# Altium PCB Wikiot.PcbDoc (part 1 of 2)
Units mil, origin at the board's own origin, x right, y up, seen from the top; angles counter-clockwise.
Board outline 3930 x 3935 mil, 2 copper layers (Top Layer, Bottom Layer); 175 components, 192 nets, 839 pads, 312 vias.
Unrouted connection lines stored in the file: 184.
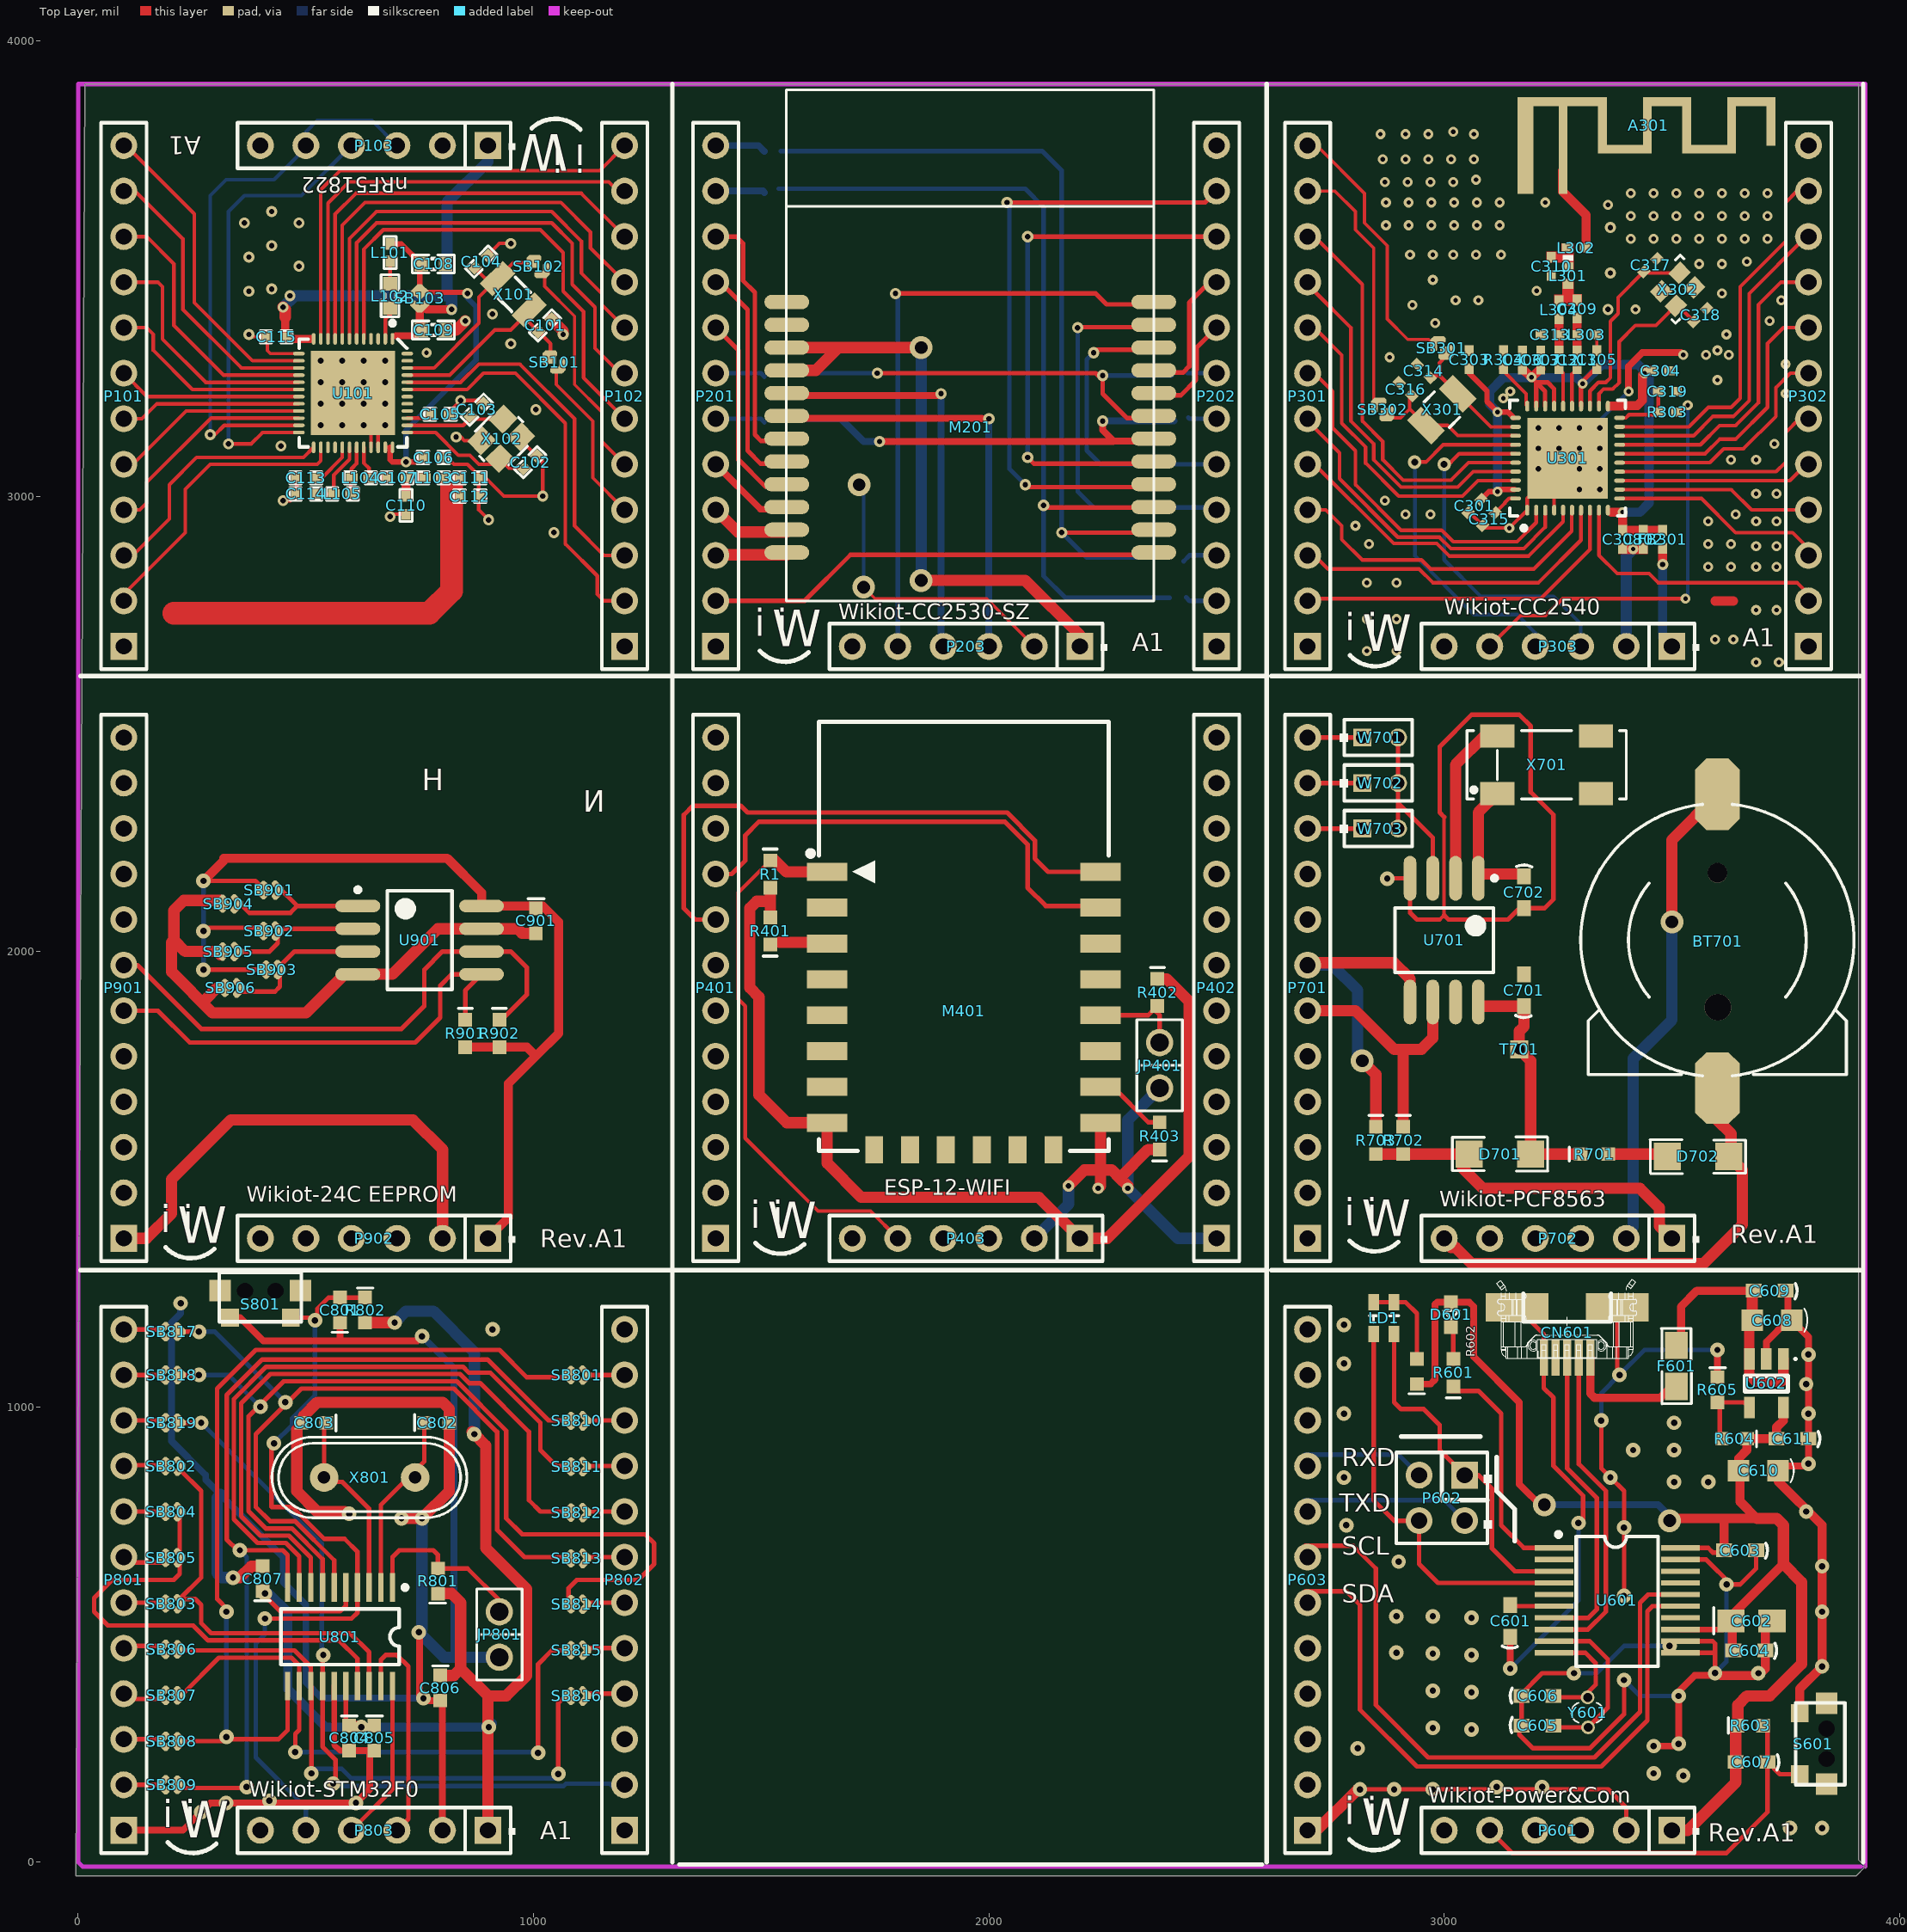
[diagram p0: Top Layer view]
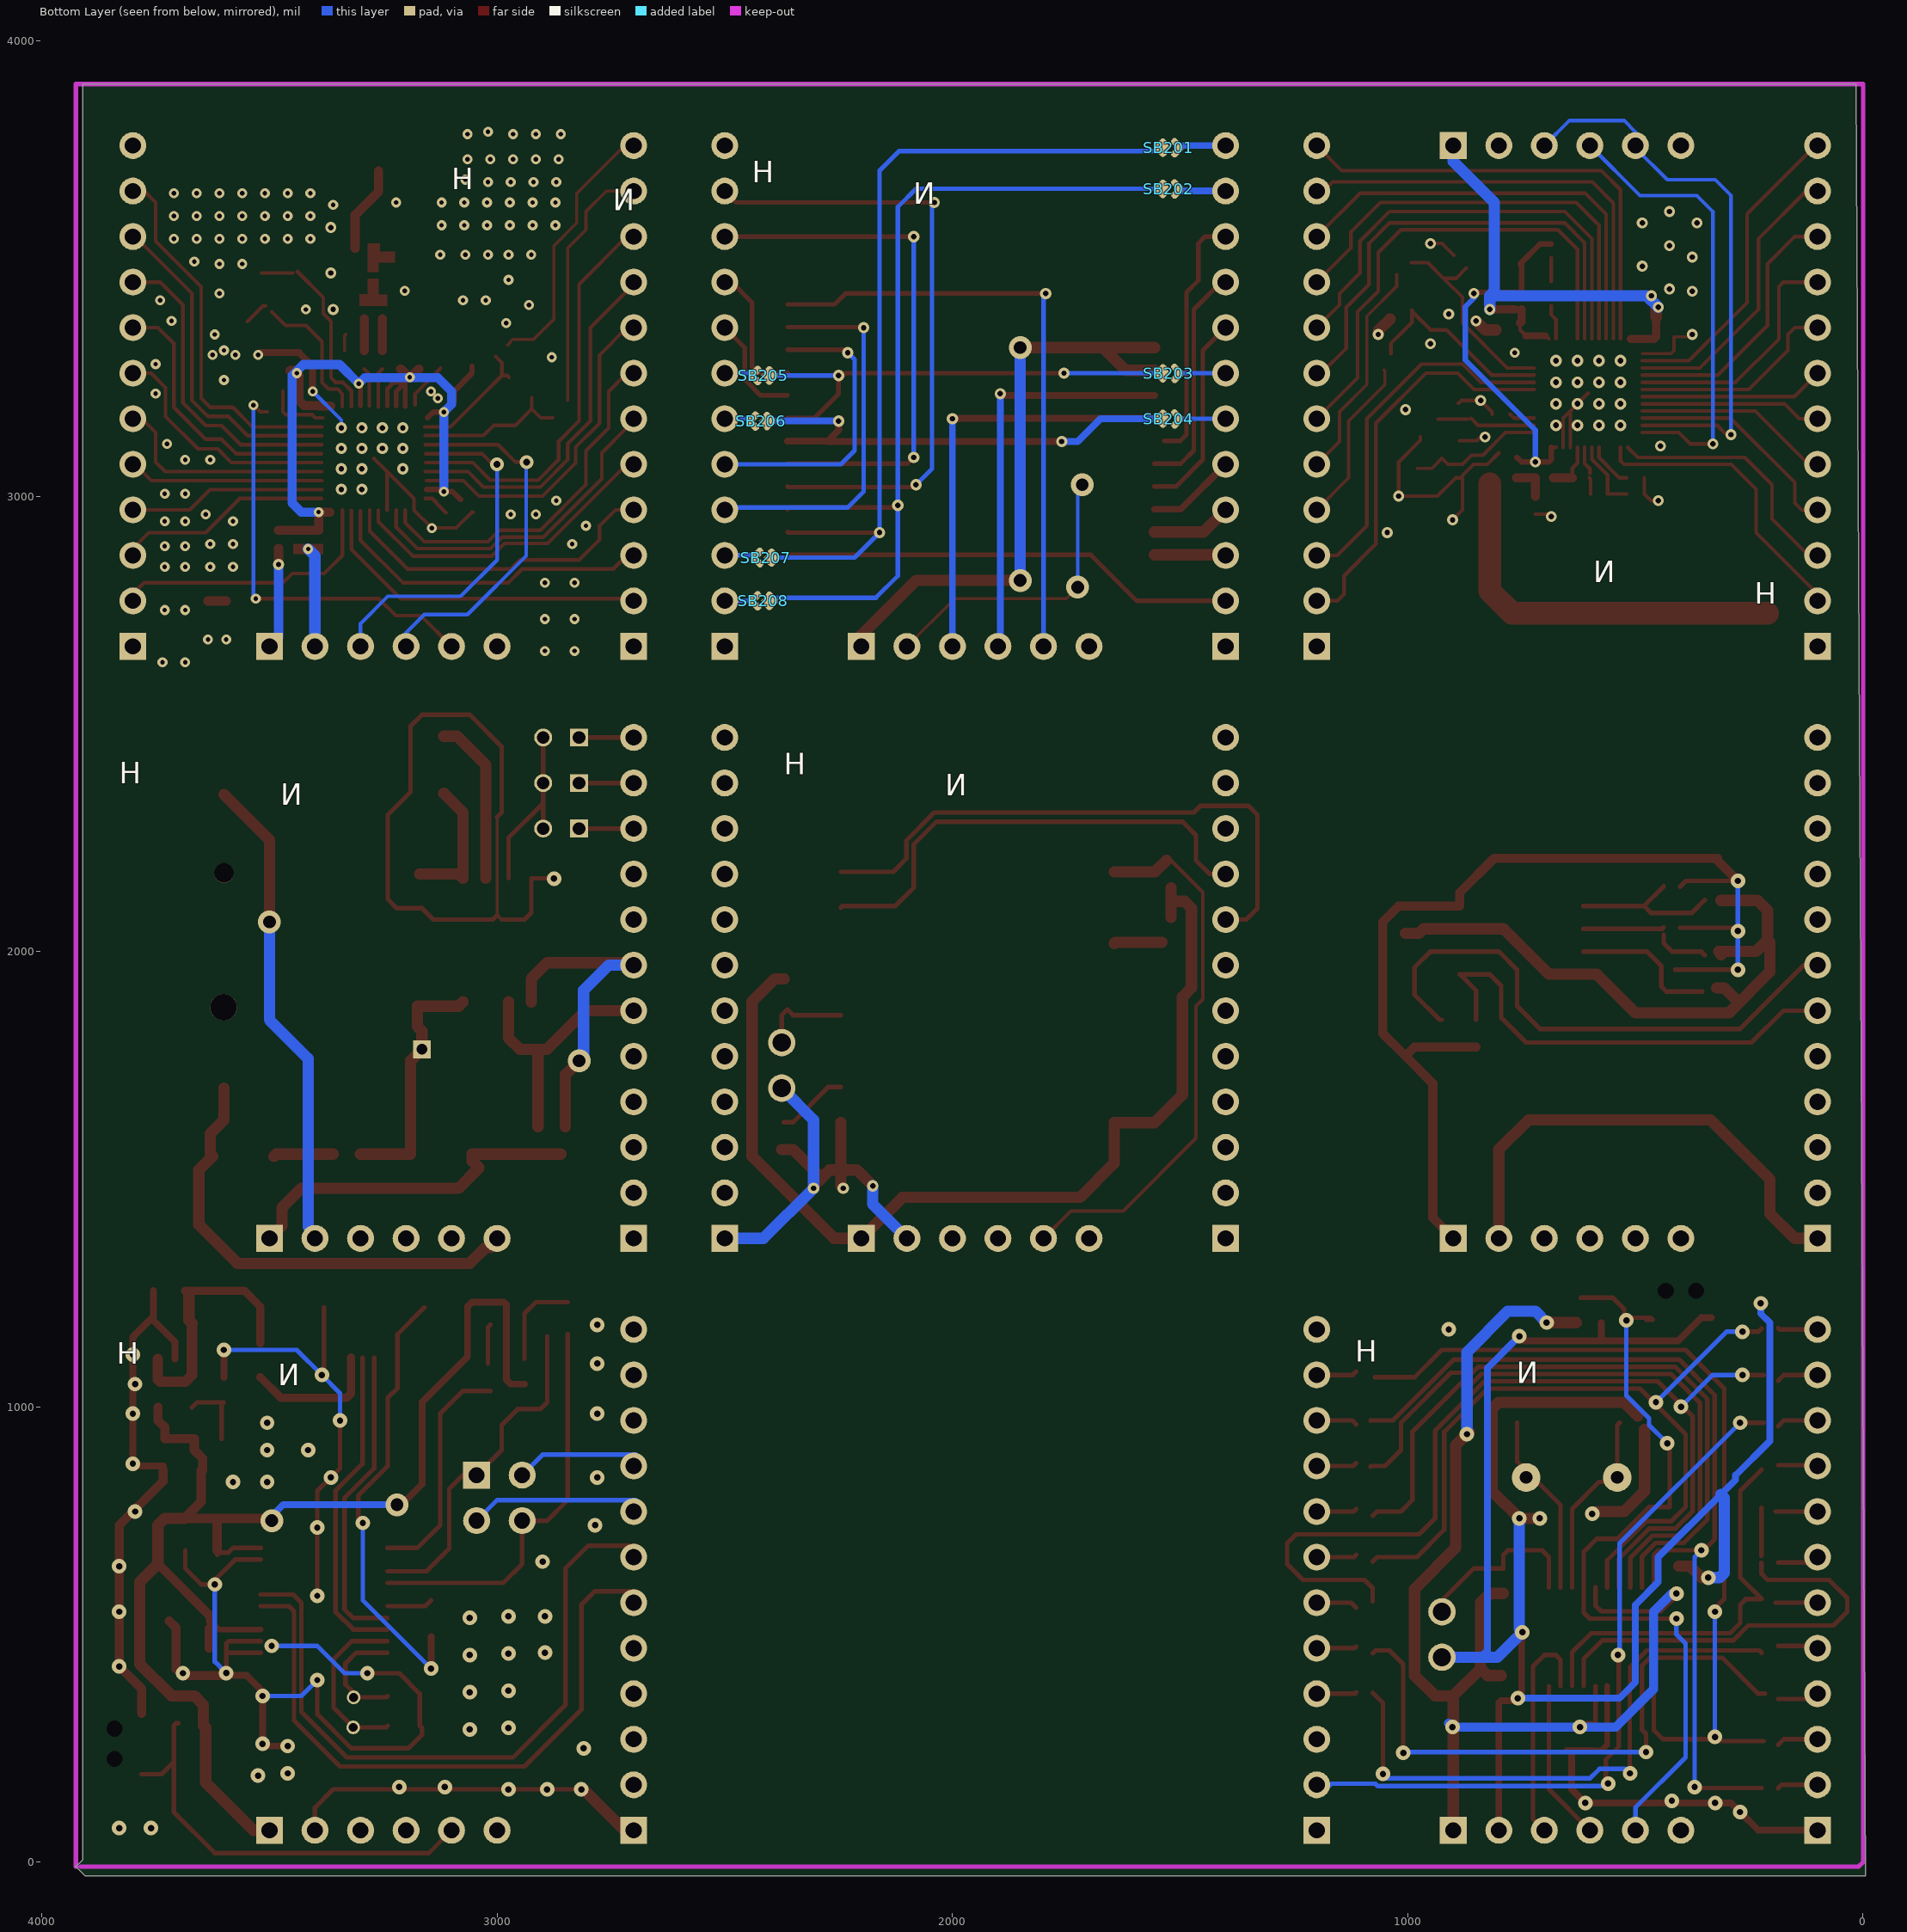
[diagram p1: Bottom Layer view, seen from below]

## Layer stack, top to bottom
Top Layer: signal copper 1.4
Dielectric: dielectric 12.6, FR-4, Dk 4.8
Bottom Layer: signal copper 1.4

## Board outline
15,3905 3910,3905 3910,5 3925,-10 3905,-30 -5,-30

## Design rules (kind name [scope] priority, off if disabled: settings)
Clearance [All] p1: gap=6
PolygonConnect [All] p1: connectstyle=Relief reliefconductorwidth=10 reliefentries=4 polygonreliefangle="90 Angle"
RoomDefinition ESP8266 [InComponentClass('ESP8266')] p1: confinementstyle=ConfineIn formatcopy=TRUE lockcomponents=FALSE outline 1269.84,1313.7 2605,1313.7 2605,2633.7 1269.84,2633.7
RoomDefinition CC2530-Module [InComponentClass('CC2530-Module')] p2: confinementstyle=ConfineIn formatcopy=TRUE lockcomponents=FALSE outline 1305,2615 2610,2615 2610,3930 1305,3930
RoomDefinition 24CXX [InComponentClass('24CXX')] p3: confinementstyle=ConfineIn formatcopy=TRUE lockcomponents=FALSE outline 0,1310 1305,1310 1305,2620 0,2620
RoomDefinition STM32F030F [InComponentClass('STM32F030F')] p4: confinementstyle=ConfineIn formatcopy=TRUE lockcomponents=FALSE outline 0,-50 1360,-50 1360,1300 0,1300
RoomDefinition PCF8563 [InComponentClass('PCF8563')] p5: confinementstyle=ConfineIn formatcopy=TRUE lockcomponents=FALSE outline 2615,1290 3940,1290 3940,2610 2615,2610
RoomDefinition Power&Com [InComponentClass('Power&Com')] p6: confinementstyle=ConfineIn formatcopy=TRUE lockcomponents=FALSE outline 2630,1295 3910,1295 3910,-10 2630,-10
RoomDefinition nRF51822 [InComponentClass('nRF51822')] p7: confinementstyle=ConfineIn formatcopy=TRUE lockcomponents=FALSE outline 0,2610 1305,2610 1305,3905 0,3905
RoomDefinition CC2541A [InComponentClass('CC2541A')] p8: confinementstyle=ConfineIn formatcopy=TRUE lockcomponents=FALSE outline 2605,2605 3925,2605 3925,3900 2605,3900
RoutingVias [All] p1: holewidth=12 width=25 viastyle="Through Hole" minholewidth=12 minwidth=25 maxholewidth=28 maxwidth=50
SilkscreenOverComponentPads SilkToSolderMaskClearance [IsPad] p1: minsilkscreentomaskgap=10
SolderMaskExpansion [All] p1: expansion=4
Width [All] p1: maxlimit=55 minlimit=7 preferedwidth=10
27 further rules are at their usual default settings.

## Classes and differential pairs
component class ESP8266: JP401 M401 P401 P402 P403 R1 R401 R402 R403
component class CC2530-Module: M201 P201 P202 P203 SB201 SB202 SB203 SB204 SB205 SB206 SB207 SB208
component class 24CXX: C901 P901 P902 R901 R902 SB901 SB902 SB903 SB904 SB905 SB906 U901
component class PCF8563: BT701 C701 C702 D701 D702 P701 P702 R701 R702 R703 T701 U701 W701 W702 W703 X701
component class Power&Com: BT? C601 C602 C603 C604 C605 C606 C607 C608 C609 C610 C611 CN601 CN? D601 F601 LD1 LS? P601 P602 P603 R601 R602 R603 R604 R605 S601 U601 U602 U? Y601
component class nRF51822: C101 C102 C103 C104 C105 C106 C107 C108 C109 C110 C111 C112 C113 C114 C115 L101 L102 L103 L104 L105 P101 P102 P103 SB101 SB102 SB103 U101 X101 X102
component class CC2541A: A301 C301 C302 C303 C304 C305 C306 C307 C308 C309 C310 C311 C312 C313 C314 C315 C316 C317 C318 C319 FB301 L301 L302 L303 L304 P301 P302 P303 R303 R304 SB301 SB302 U301 X301 X302
component class STM32F030F: C801 C802 C803 C804 C805 C806 C807 JP801 P801 P802 P803 R801 R802 S801 SB801 SB802 SB803 SB804 SB805 SB806 SB807 SB808 SB809 SB810 SB811 SB812 SB813 SB814 SB815 SB816 SB817 SB818 SB819 U801 X801

## Components (designator, comment, footprint, x,y, rotation, side; value= is the part's Value field where it differs from the comment)
A301 "ANTENNA IIFA BLE" Antenna_IIFA_BLE-2 3407,3800 r180 top net-tie
BT701 "Battery" "BAT CR1220" 3600,2025 r270 top
C101 "12pF" CAPC1005X04L 1025,3375 r45 top
C102 "12pF" CAPC1005X04L 992.78,3074.64 r45 top
C103 "12pF" CAPC1005X04L 875,3190 r45 top
C104 "12pF" CAPC1005X04L 885,3515 r45 top
C105 "100nF" CAPC1005X04L 795,3180 r0 top
C106 "1.0nF" CAPC1005X04L 780,3085 r0 top
C107 "2.2pF" CAPC1005X04L 700,3040 r0 top
C108 "1.0µF" CAPC1608X06L 780,3510 r180 top
C109 "4.7µF" CAPC1608X06L 780,3365 r0 top
C110 "0.8pF" CAPC1005X04L 720,2980 r270 top
C111 "1.5pF" CAPC1005X04L 860,3040 r0 top
C112 "1.2pF" CAPC1005X04L 860,3000 r0 top
C113 "47nF" CAPC1005X04L 500,3040 r180 top
C114 "2.2nF" CAPC1005X04L 500,3005 r180 top
C115 "100nF" CAPC1005X04L 435,3350 r180 top
C301 "C1005X5R0J105M" 0402L 3066.46,2978.54 r225 top
C302 "GRM155R71A104KA01D" 0402L 3437,2905 r270 top
C303 "GRM155R71A104KA01D" 0402L 3055,3300 r90 top
C304 "GRM155R71A104KA01D" 0402L 3475,3275 r0 top
C305 "GRM155R71A104KA01D" 0402L 3335,3300 r90 top
C306 "GRM1555C1H221JA01D" 0402L 3172,3299.1 r90 top
C307 "GRM155R71A104KA01D" 0402L 3212,3299.1 r90 top
C308 "JMK105BJ225MV-F" 0402L 3392,2905 r270 top
C309 "GRM1555C1H1R0CA01D" 0402L 3292,3411 r90 top
C310 "GRM1555C1HR40BA01D" 0402L 3235,3505 r270 top
C311 "GRM1555C1H180JA01D" 0402L 3291.99,3299.37 r270 top
C312 "GRM1555C1H180JA01D" 0402L 3251.99,3299.37 r270 top
C313 "GRM1555C1H1R0CA01D" 0402L 3231.99,3354.37 r180 top
C314 "GRM1555C1H150JA01D" 0402L 2955,3275 r135 top
C315 "C1005X5R0J105M" 0402L 3098.28,2949.54 r225 top
C316 "GRM1555C1H150JA01D" 0402L 2915,3235 r135 top
C317 "GRM1555C1H120JA01D" 0402L 3452.82,3507.18 r45 top
C318 "GRM1555C1H120JA01D" 0402L 3562.43,3397.57 r45 top
C319 "GRM1555C1H102JA01D" 0402L 3490,3230 r0 top
C601 "0.1uF" C0603L 3145,530 r90 top
C602 "1uF" 0805M 3630,530 r0 top
C603 "Cap" C0603L 3650,685 r180 top
C604 "Cap" C0603L 3670,465 r180 top
C605 "Cap" C0603L 3205,300 r0 top
C606 "Cap" C0603L 3205,365 r0 top
C607 "10uF" C0603L 3675,220 r180 top
C608 "22uF" C0805 3720,1190 r180 top
C609 "104" C0603L 3715,1255 r180 top
C610 "22uF" C0805 3690,860 r180 top
C611 "104" C0603L 3765,930 r180 top
C701 "100nF" C0603L 3175,1915 r90 top
C702 "22pF" C0603L 3175,2130 r270 top
C801 "100nF" 0603M 575,1185 r90 top
C802 "20pF" 0603M 760,965 r0 top
C803 "20pF" 0603M 545,965 r180 top
C804 "1uF" 0603M 595,300 r270 top
C805 "100nF" 0603M 650,300 r270 top
C806 "100nF" 0603M 795,410 r270 top
C807 "100nF" 0603M 405,595 r90 top
C901 "100nF" 0603M 1005,2095 r270 top
CN601 "USB-Micro" USB-MICRO-Lite 3270,1215 r0 top
D601 "LED1" 0603pn 3015,1230 r270 top
D701 "1N4148" 1206 3055,1555 r0 top
D702 "1N4148" 1206 3625,1550 r180 top
F601 "500mA" 0805 3510,1135 r270 top
FB301 "BLM15HG102SN1D" 0402 3480,2905 r270 top
JP401 "UART Download" SIP2 2375,1700 r90 top
JP801 "Jumper2" SIP2 925,450 r90 top
L101 "15nH" INDC1005X04L 685,3535 r90 top
L102 "10µH" INDC1608X06L 685,3440 r90 top
L103 "3.3nH" INDC1005X04L 780,3040 r0 top
L104 "4.7nH" INDC1005X04L 620,3040 r0 top
L105 "10nH" INDC1005X04L 580,3005 r0 top
L301 "LQG15HS2N2S02D" IND_LQG15H 3271.99,3484.37 r270 top
L302 "LQG15HH5N1S02D" 0402L 3290,3545 r180 top
L303 "LQG15HS2N0S02D" 0402L 3313,3355 r0 top
L304 "LQG15HS2N0S02D" 0402L 3251.99,3409.37 r270 top
LD1 "LTST-C195KGJRKT" 0805-LED-Bi 2865,1155 r90 top
M201 "CC2530 SZ1" CC2530-SMT 1555,2770 r0 top
M401 "ESP_12E" ESP_12E 1630,2175 r0 top
P101 "Synio Header-L 12-Pin" HDR1X12 100,2670 r90 top
P102 "Synio Header-R 12-Pin" HDR1X12 1200,2670 r90 top
P103 "Synio Power Header 6 Pin" HDR1X6/2.54MM 900,3770 r180 top
P201 "Synio Header-L 12-Pin" HDR1X12 1400,2670 r90 top
P202 "Synio Header-R 12-Pin" HDR1X12 2500,2670 r90 top
P203 "Synio Power Header 6 Pin" HDR1X6/2.54MM 2200,2670 r180 top
P301 "Synio Header-L 12-Pin" HDR1X12 2700,2670 r90 top
P302 "Synio Header-R 12-Pin" HDR1X12 3800,2670 r90 top
P303 "Synio Power Header 6 Pin" HDR1X6/2.54MM 3500,2670 r180 top
P401 "Synio Header-L 12-Pin" HDR1X12 1400,1370 r90 top
P402 "Synio Header-R 12-Pin" HDR1X12 2500,1370 r90 top
P403 "Synio Power Header 6 Pin" HDR1X6/2.54MM 2200,1370 r180 top
P601 "Synio Power Header 6 Pin" HDR1X6/2.54MM 3500,70 r180 top
P602 "Header 2X2" HDR2X2/2.54MM 3045,850 r180 top
P603 "Synio Header-L 12-Pin" HDR1X12 2700,70 r90 top
P701 "Synio Header-L 12-Pin" HDR1X12 2700,1370 r90 top
P702 "Synio Power Header 6 Pin" HDR1X6/2.54MM 3500,1370 r180 top
P801 "Synio Header-L 12-Pin" HDR1X12 100,70 r90 top
P802 "Synio Header-R 12-Pin" HDR1X12 1200,70 r90 top
P803 "Synio Power Header 6 Pin" HDR1X6/2.54MM 900,70 r180 top
P901 "Synio Header-L 12-Pin" HDR1X12 100,1370 r90 top
P902 "Synio Power Header 6 Pin" HDR1X6/2.54MM 900,1370 r180 top
R1 "10K" R0603 1520,2170 r270 top
R303 "CRCW04022K74FKED" 0402L 3490,3185 r180 top
R304 "CRCW040256K2FKED" 0402L 3130,3300 r270 top
R401 "10K" R0603 1520,2045 r90 top
R402 "10K" R0603 2370,1910 r270 top
R403 "1K" R0603 2375,1595 r90 top
R601 "1K" R0603 3020,1075 r90 top
R602 "1K" 0603M 2940,1050 r90 top
R603 "10K" 0603M 3645,300 r0 top
R604 "NC" 0603M 3665,930 r180 top
R605 "NC" 0603M 3600,1065 r270 top
R701 "200" R0603 3330,1555 r0 top
R702 "3.3K" R0603 2910,1585 r270 top
R703 "3.3K" R0603 2850,1585 r270 top
R801 "10K" 0603M 790,590 r90 top
R802 "100K" 0603M 630,1240 r270 top
R901 "1K" R0603 850,1820 r270 top
R902 "1K" R0603 925,1820 r270 top
S601 "RESET" KEY-2x4-SMD 3840,260 r270 top
S801 "RESET" KEY-2x4-SMD 400,1255 r0 top
SB101 "Solderbridge" JP2_SMD 1045,3295 r135 top
SB102 "Solderbridge" JP2_SMD 1010,3505 r135 top
SB103 "Solderbridge" JP2_SMD 750,3434.6 r90 top
SB201 "Circuit Breaker" JP2_SMD 1525,3765 r0 bottom
SB202 "Circuit Breaker" JP2_SMD 1525,3675 r0 bottom
SB203 "Circuit Breaker" JP2_SMD 1525,3270 r0 bottom
SB204 "Circuit Breaker" JP2_SMD 1525,3170 r0 bottom
SB205 "Circuit Breaker" JP2_SMD 2415,3265 r180 bottom
SB206 "Circuit Breaker" JP2_SMD 2420,3165 r180 bottom
SB207 "Circuit Breaker" JP2_SMD 2410,2865 r180 bottom
SB208 "Circuit Breaker" JP2_SMD 2415,2770 r180 bottom
SB301 "Solderbridge" JP2_SMD 2995,3325 r315 top
SB302 "Solderbridge" JP2_SMD 2865,3190 r315 top
SB801 "Circuit Breaker" JP2_SMD 1095,1070 r180 top
SB802 "Circuit Breaker" JP2_SMD 204.74,870 r180 top
SB803 "Circuit Breaker" JP2_SMD 204.74,567.97 r180 top
SB804 "Circuit Breaker" JP2_SMD 204.74,769.32 r180 top
SB805 "Circuit Breaker" JP2_SMD 204.74,668.65 r180 top
SB806 "Circuit Breaker" JP2_SMD 205,467.03 r0 top
SB807 "Circuit Breaker" JP2_SMD 205,366.35 r0 top
SB808 "Circuit Breaker" JP2_SMD 205,265.68 r0 top
SB809 "Circuit Breaker" JP2_SMD 205,170 r0 top
SB810 "Circuit Breaker" JP2_SMD 1095,969.29 r180 top
SB811 "Circuit Breaker" JP2_SMD 1095,868.57 r180 top
SB812 "Circuit Breaker" JP2_SMD 1095,767.86 r180 top
SB813 "Circuit Breaker" JP2_SMD 1095,667.14 r180 top
SB814 "Circuit Breaker" JP2_SMD 1095,566.43 r180 top
SB815 "Circuit Breaker" JP2_SMD 1095,465.71 r180 top
SB816 "Circuit Breaker" JP2_SMD 1095,365 r180 top
SB817 "Circuit Breaker" JP2_SMD 205,1165 r0 top
SB818 "Circuit Breaker" JP2_SMD 205,1070 r0 top
SB819 "Circuit Breaker" JP2_SMD 205,965 r0 top
SB901 "Circuit Breaker" JP2_SMD 420,2135 r180 top
SB902 "Circuit Breaker" JP2_SMD 420,2045 r180 top
SB903 "Circuit Breaker" JP2_SMD 425,1960 r180 top
SB904 "Circuit Breaker" JP2_SMD 330,2105 r180 top
SB905 "Circuit Breaker" JP2_SMD 330,2000 r180 top
SB906 "Circuit Breaker" JP2_SMD 335,1920 r180 top
T701 "TP" TP 3165,1785 r90 top
U101 "nRF51822-QFAA" QFN40P600X600X90-48N 603.62,3226.38 r270 top
U301 "CC2541RHA" RHA0040H 3270.99,3083.37 r90 top
U601 "CH341T" SSOP20 3380,575 r270 top
U602 "LDO" SOT23-5 3745,1105 r180 top
U701 "PCF8563" SO8W_M 3000,2025 r270 top
U801 "STM32F030F4" TSSOP20 575,495 r180 top
U901 "AT24C32" SO8W_M 750,2025 r0 top
W701 "Jumper2-1" HDR1X2/2.00MM 2820,2470 r0 top
W702 "Jumper2-1" HDR1X2/2.00MM 2820,2370 r0 top
W703 "Jumper2-1" HDR1X2/2.00MM 2820,2270 r0 top
X101 "32.768kHz" FC-135 955.86,3443.28 r315 top
X102 "16MHz" BT-XTAL_2520 929.14,3126.09 r45 top
X301 "ABS07-32.768KHZ-9-T" XTAL_ABS07 2995,3190 r225 top
X302 "Q22FA1280009200" XTAL_FA-128 3512.93,3454.14 r315 top
X701 "MC306-32.768-12.5pF-20PPM" SM8 3225,2410 r0 top
X801 "8MHz" XTAL_49S 640,845 r0 top
Y601 "12MHz" XTAL0803 3315,330 r90 top

## Footprints (in the part's own frame and the unit in brackets; to place one, negate y for a bottom-side part, rotate by r counter-clockwise, add the part's x,y. Pads: shape width x height; smd on the part's side, far side on the other; paste and mask are expansions set on the pad)
0402 [mm] "Chip Capacitor, Body 1.0x0.5mm, IPC High Density"
  rect 0.6x0.5 smd: 1(-0.5,0) 2(0.5,0)
  body extent -0.55,-0.3 0.55,0.3, height 1.3
0402L [mm] "0402 from SM-752 data"
  rect 0.6x0.5 smd: 1(-0.5,0) 2(0.5,0)
  body extent -0.55,-0.3 0.55,0.3, height 0.6
0603M [mil]
  rect 30x30 smd: 1(0,0) 2(55,0)
  silkscreen extent -21,-17 -21,18, body extent -5,-15 60,15, height 43
0603pn [mil]
  rect 30x30 smd: 1(0,0) 2(55,0)
  silkscreen extent 19,-17 36,18
0805 [mil]
  rect 60x50 smd: 1(0,0) 2(90,0)
  silkscreen extent -37,-33 129,33
0805-LED-Bi [mm]
  rect 0.9x0.6 smd: 1(0.127,-0.635) 2(0.127,0.508) 3(1.905,0.508) 4(1.905,-0.635)
  silkscreen extent 0.76,-0.89 1.14,0.76, body extent 0.32,-1.02 1.72,0.9, height 1.1
0805M [mil]
  rect 60x50 smd: 1(0,0) 2(90,0)
  silkscreen extent -38,-29 -38,29
1206 [mil]
  rect 60x60 smd: 1(0,0) 2(135,0)
  silkscreen extent -37,-37 173,38, body extent 15,-30 120,30, height 43
Antenna_IIFA_BLE-2 [mm]
  rect 0.5x5.39 smd paste-0.3 mask-0.3: 1(3.706,0.77)
  rect 5x0.5 smd paste-0.3 mask-0.3: 1B(3.756,-1.675)
  rect 0.5x3.14 smd paste-0.3 mask-0.3: 1C(1.506,-0.355) 1E(-0.994,-0.355) 1G(-3.194,-0.355) 1J(-5.694,-0.355)
  rect 3x0.5 smd paste-0.3 mask-0.3: 1D(0.256,0.965)
  rect 2.7x0.5 smd paste-0.3 mask-0.3: 1F(-2.094,-1.675) 1H(-4.319,0.965) 1K(-6.794,-1.675)
  rect 0.5x2.69 smd paste-0.3 mask-0.3: 1L(-7.894,-0.58)
  rect 0.9x5.39 smd paste-0.45 mask-0.45: 2(5.806,0.77)
"BAT CR1220" [mm]
  round 1.1 hole 1.1 unplated: 0(-3.75,0)
  round 1.5 hole 1.5 unplated: 0(3.75,0.025)
  oct 4x2.5 smd: 1(8.255,0) 2(-8.128,0)
  silkscreen extent -7.57,-7.62 7.57,7.62
BT-XTAL_2520 [mm]
  rect 1.2x1.1 smd: 1(-0.85,-0.7) 2(0.85,-0.7) 3(0.85,0.7) 4(-0.85,0.7)
  silkscreen extent -1.55,-1.33 1.53,1.32, body extent -1.25,-1 1.27,1, height 0.56
C0603L [mil]
  rect 35x30 smd: 1(-35,0) 2(35,0)
  silkscreen extent -60,-16 -56,18, body extent -31,-16 32,15, height 24
C0805 [mm]
  rect 1.2x1.2 smd: 1(-1.1,0) 2(1.1,0)
  silkscreen extent -1.97,-0.65 -1.8,0.65, body extent -0.99,-0.61 1.01,0.59, height 1.2
CAPC1005X04L [mm]
  rect 0.6x0.5 smd: 1(-0.5,0) 2(0.5,0)
  silkscreen extent -0.9,-0.35 0.9,0.35, body extent -0.51,-0.25 0.51,0.25, height 0.5
CAPC1608X06L [mm] "Chip Capacitor, 2-Leads, Body 1.6x0.8mm, IPC High Dens"
  rect 0.75x0.8 smd: 1(-0.675,0) 2(0.675,0)
  silkscreen extent -1.17,-0.5 1.17,0.5, body extent -0.8,-0.43 0.8,0.43, height 0.8
CC2530-SMT [mm]
  oval 2.5x0.8 smd: 1(0.031,16.67) 2(0.031,15.4) 3(0.031,14.13) 4(0.031,12.86) 5(0.031,11.59) 6(0.031,10.32) 7(0.031,9.05) 8(0.031,7.78) 9(0.031,6.51) 10(0.031,5.24) 11(0.031,3.97) 12(0.031,2.7) 13(20.5,2.7) 14(20.5,3.97) 15(20.5,5.24) 16(20.5,6.51) 17(20.5,7.78) 18(20.5,9.05) 19(20.5,10.32) 20(20.5,11.59) 21(20.5,12.86) 22(20.5,14.13) 23(20.5,15.4) 24(20.5,16.67)
  silkscreen extent 0,0 20.5,28.5
ESP_12E [mm] "ESP-12 Wi-Fi Module by AI-Thinker"
  rect 2.25x1 smd: 1(0.375,0) 2(0.375,-2) 3(0.375,-4) 4(0.375,-6) 5(0.375,-8) 6(0.375,-10) 7(0.375,-12) 8(0.375,-14) 15(15.625,-14) 16(15.625,-12) 17(15.625,-10) 18(15.625,-8) 19(15.625,-6) 20(15.625,-4) 21(15.625,-2) 22(15.625,0)
  rect 1x1.5 smd: 9(3,-15.5) 10(5,-15.5) 11(7,-15.5) 12(9,-15.5) 13(11,-15.5) 14(13,-15.5)
  silkscreen extent -0.7,-15.57 16.08,8.37, body extent 0,-15.49 16,8.51, height 2.75
FC-135 [mm]
  rect 1x1.8 smd: 1(-1.25,0) 2(1.25,0)
  silkscreen extent -0.6,-0.75 0.6,0.75, body extent -1.6,-0.75 1.6,0.75, height 0.81
HDR1X2/2.00MM [mm] "Connector; Header; 2 Position"
  rect 1x1 hole 0.7: 1(0,0)
  round 1 hole 0.7: 2(2,0)
  silkscreen extent -1.27,-1 2.79,1
HDR1X6/2.54MM [mm] "Connector; Header; 6 Position"
  rect 1.5x1.5 hole 0.9: 1(0,0)
  round 1.5 hole 0.9: 2(2.54,0) 3(5.08,0) 4(7.62,0) 5(10.16,0) 6(12.7,0)
  silkscreen extent -1.52,-1.27 13.97,1.27
HDR1X12 [mm] "Connector; Header; 12 Position"
  rect 1.5x1.5 hole 0.9: 1(0,0)
  round 1.5 hole 0.9: 2(2.54,0) 3(5.08,0) 4(7.62,0) 5(10.16,0) 6(12.7,0) 7(15.24,0) 8(17.78,0) 9(20.32,0) 10(22.86,0) 11(25.4,0) 12(27.94,0)
  silkscreen extent -1.27,-1.27 29.21,1.27
HDR2X2/2.54MM [mm] "Connector; Header; 2x2 Position"
  rect 1.5x1.5 hole 0.9: 1(0,0)
  round 1.5 hole 0.9: 2(0,2.54) 3(2.54,0) 4(2.54,2.54)
  silkscreen extent -1.52,-1.27 3.81,3.81
IND_LQG15H [mm] "MuRata"
  rect 0.55x0.6 smd: 1(-0.475,0) 2(0.475,0)
  silkscreen extent -1.16,-0.3 -0.81,0.3, body extent -0.52,-0.27 0.52,0.27, height 0.55
INDC1005X04L [mm] "Chip Inductor, 2-Leads, Body 1.0x0.5mm, IPC High Density"
  rect 0.65x0.5 smd: 1(-0.475,0) 2(0.475,0)
  silkscreen extent -0.9,-0.35 0.9,0.35, body extent -0.5,-0.3 0.5,0.3, height 0.5
INDC1608X06L [mm]
  rect 0.75x0.8 smd: 1(-0.675,0) 2(0.675,0)
  silkscreen extent -1.17,-0.5 1.17,0.5, body extent -0.8,-0.48 0.8,0.48, height 0.8
JP2_SMD [mil]
  oct 15x30 smd rot 45: 1(-18,-8) 2(18,7)
  oct 15.75x30 smd rot 135: 1(-18,8)
  rect 26x26 smd rot 45: 2(13,0)
  oct 15x30 smd rot 135: 2(18,-7)
KEY-2x4-SMD [mm] "6.8MM,2.8MM,SMD"
  rect 1.2x1.2 smd: 0(-2.25,0) 0(2.25,0)
  rect 1x1 smd: 1(-1.7,-1.5) 2(1.7,-1.5)
  round 0.8 hole 0.9 unplated: MH1(0.85,0) MH2(-0.85,0)
  silkscreen extent -2.29,-1.73 2.29,1.02, body extent -2.28,-1.6 2.29,0.94, height 1.1
QFN40P600X600X90-48N [mm]
  oval 0.65x0.2 smd: 1(-3.025,2.2) 2(-3.025,1.8) 3(-3.025,1.4) 4(-3.025,1) 5(-3.025,0.6) 6(-3.025,0.2) 7(-3.025,-0.2) 8(-3.025,-0.6) 9(-3.025,-1) 10(-3.025,-1.4) 11(-3.025,-1.8) 12(-3.025,-2.2) 25(3.025,-2.2) 26(3.025,-1.8) 27(3.025,-1.4) 28(3.025,-1) 29(3.025,-0.6) 30(3.025,-0.2) 31(3.025,0.2) 32(3.025,0.6) 33(3.025,1) 34(3.025,1.4) 35(3.025,1.8) 36(3.025,2.2)
  oval 0.2x0.65 smd: 13(-2.2,-3.025) 14(-1.8,-3.025) 15(-1.4,-3.025) 16(-1,-3.025) 17(-0.6,-3.025) 18(-0.2,-3.025) 19(0.2,-3.025) 20(0.6,-3.025) 21(1,-3.025) 22(1.4,-3.025) 23(1.8,-3.025) 24(2.2,-3.025) 37(2.2,3.025) 38(1.8,3.025) 39(1.4,3.025) 40(1,3.025) 41(0.6,3.025) 42(0.2,3.025) 43(-0.2,3.025) 44(-0.6,3.025) 45(-1,3.025) 46(-1.4,3.025) 47(-1.8,3.025) 48(-2.2,3.025)
  rect 4.7x4.7 smd: 49(0,0)
  silkscreen extent -4.02,-3 3,3, body extent -3,-3 3,3, height 0.9
R0603 [mil]
  rect 30x30 smd: 1(-30,0) 2(30,0)
  silkscreen extent -55,-15 -55,15, body extent -31,-16 32,15, height 18
RHA0040H [mm] "QFN, 40-Leads, Body 6x6mm, Pitch 0.5mm, Thermal Pad 4.15 x 4.15mm, TI Recommended"
  oval 0.6x0.23 smd mask+0.07: 1(-2.9,2.25) 2(-2.9,1.75) 3(-2.9,1.25) 4(-2.9,0.75) 5(-2.9,0.25) 6(-2.9,-0.25) 7(-2.9,-0.75) 8(-2.9,-1.25) 9(-2.9,-1.75) 10(-2.9,-2.25) 21(2.9,-2.25) 22(2.9,-1.75) 23(2.9,-1.25) 24(2.9,-0.75) 25(2.9,-0.25) 26(2.9,0.25) 27(2.9,0.75) 28(2.9,1.25) 29(2.9,1.75) 30(2.9,2.25)
  oval 0.23x0.6 smd mask+0.07: 11(-2.25,-2.9) 12(-1.75,-2.9) 13(-1.25,-2.9) 14(-0.75,-2.9) 15(-0.25,-2.9) 16(0.25,-2.9) 17(0.75,-2.9) 18(1.25,-2.9) 19(1.75,-2.9) 20(2.25,-2.9) 31(2.25,2.9) 32(1.75,2.9) 33(1.25,2.9) 34(0.75,2.9) 35(0.25,2.9) 36(-0.25,2.9) 37(-0.75,2.9) 38(-1.25,2.9) 39(-1.75,2.9) 40(-2.25,2.9)
  rect 4.5x4.5 smd paste-2.5 mask+0.07: 41(0,0)
  silkscreen extent -4.02,-3.22 3.22,3.22, body extent -3.08,-3.08 3.08,3.08, height 1.01
SIP2 [mil]
  round 60 hole 40: 1(0,0) 2(100,0)
  silkscreen extent -50,-50 150,50
SM8 [mm]
  rect 1.9x1.3 smd: 1(-2.75,-1.6) 2(2.75,-1.6) 3(2.75,1.6) 4(-2.75,1.6)
  silkscreen extent -4.44,-1.91 4.44,1.91
SO8W_M [mm] "8-Pin Small Outline Package 1.27 mm Pitch, IPC Low Density"
  oval 2.5x0.7 smd: 1(-3.45,1.905) 2(-3.45,0.635) 3(-3.45,-0.635) 4(-3.45,-1.905) 5(3.45,-1.905) 6(3.45,-0.635) 7(3.45,0.635) 8(3.45,1.905)
  silkscreen extent -3.57,-2.75 1.8,2.93, body extent -2.73,-2.75 2.73,2.75, height 2.13
SOT23-5 [mm]
  rect 0.6x1.2 smd: 1(0,0) 2(0.95,0) 3(1.9,0) 4(1.9,2.7) 5(0,2.7)
  silkscreen extent -0.69,0 2.13,1.8, body extent -0.32,0.7 2.35,2.1, height 1.1
SSOP20 [mm] "SSOP, Plastic; 20 Leads; Body Width 5.3 mm; Pitch 0.65 mm"
  rect 0.3x2.15 smd: 1(-2.925,-3.529) 2(-2.275,-3.529) 3(-1.625,-3.529) 4(-0.975,-3.529) 5(-0.325,-3.529) 6(0.325,-3.529) 7(0.975,-3.529) 8(1.625,-3.529) 9(2.275,-3.529) 10(2.925,-3.529) 11(2.925,3.529) 12(2.275,3.529) 13(1.625,3.529) 14(0.975,3.529) 15(0.325,3.529) 16(-0.325,3.529) 17(-0.975,3.529) 18(-1.625,3.529) 19(-2.275,3.529) 20(-2.925,3.529)
  silkscreen extent -3.8,-3.4 3.68,2.29
TP [mm] "2.00MM Hole"
  rect 1x1 hole 0.6: 1(0,0)
TSSOP20 [mm] "Shrink Small Outline; 20 Leads; Body Width 4.4 mm; Pitch 0.65 mm"
  rect 0.3x1.6 smd: 1(-2.925,-2.75) 2(-2.275,-2.75) 3(-1.625,-2.75) 4(-0.975,-2.75) 5(-0.325,-2.75) 6(0.325,-2.75) 7(0.975,-2.75) 8(1.625,-2.75) 9(2.275,-2.75) 10(2.925,-2.75) 11(2.925,2.75) 12(2.275,2.75) 13(1.625,2.75) 14(0.975,2.75) 15(0.325,2.75) 16(-0.325,2.75) 17(-0.975,2.75) 18(-1.625,2.75) 19(-2.275,2.75) 20(-2.925,2.75)
  silkscreen extent -3.75,-2.87 3.3,1.55
USB-MICRO-Lite [mm] "Connector; USB2.0, Type B, SM; 5 Position; Right Angle"
  rect 3.5x1.6 smd: 0(-2.802,0.088) 0(2.798,0.088)
  rect 0.45x2 smd: 1(1.298,-2.714) 2(0.648,-2.714) 3(-0.002,-2.714) 4(-0.652,-2.714) 5(-1.302,-2.714)
  silkscreen extent -3.92,-2.74 3.88,1.65
XTAL0803 [mil]
  round 30 hole 19.68: 1(-34,-1) 2(32,0)
  silkscreen extent -23,-35 20,36
XTAL_49S [mm] "Hole 1.6mm"
  round 1.6 hole 0.7: 1(2.54,0) 2(-2.54,0)
  silkscreen extent -5.45,-2.25 5.42,2.25
XTAL_ABS07 [mm] "ABRACON"
  rect 1.1x1.9 smd: 1(-1.25,0) 2(1.25,0)
  silkscreen extent -0.4,-1 0.4,1, body extent -1.65,-0.8 1.65,0.8, height 0.9
XTAL_FA-128 [mm] "SEIKO-EPSON"
  rect 0.85x0.95 smd mask+0.08: 1(-0.575,0.725) 2(-0.575,-0.725) 3(0.575,-0.725) 4(0.575,0.725)
  silkscreen extent -1.25,-1.42 1.25,1.45, body extent -0.85,-1.05 0.85,1.05, height 0.51

## Part data
A301: library part Antenna
BT701: "Multicell Battery"
C101 C102 C103 C104: library part C0402-12p, "Capacitor, NP0, ±2%"
C105 C115: library part C0402-100n, "Capacitor, X7R, ±10%"
C106: library part C0402-1n0, "Capacitor, X7R, ±10%"
C107: library part C0402-2.2p, "Capacitor, NP0, ±0.1pF"
C108: library part C0603-1μ0, "Capacitor, X7R, ±10%"
C109: library part C0603-4μ7, "Capacitor, X5R, ±10%"
C110: library part C0402-0.8p, "Capacitor, NP0, ±5%"
C111: library part C0402-1.5p, "Capacitor, NP0, ±0.1pF"
C112: library part C0402-1.2p, "Capacitor, NP0, ±0.1pF"
C113: library part C0402-47n, "Capacitor, X7R, ±10%"
C114: library part C0402-2n2, "Capacitor, X7R, ±10%"
C301 C315: "CAP, CERM, 1uF, 6.3V, +/-20%, X5R, 0402"
C302 C303 C304 C305 C307: "CAP, CERM, 0.1uF, 10V, +/-10%, X7R, 0402"
C306: "CAP, CERM, 220pF, 50V, +/-5%, C0G/NP0, 0402"
C308: "CAP, CERM, 2.2uF, 6.3V, +/-20%, X5R, 0402"
C309 C313: "CAP, CERM, 1pF, 50V, +/-5%, C0G/NP0, 0402"
C310: "CAP, CERM, 0.4pF, 50V, +/-25%, C0G/NP0, 0402"
C311 C312: "CAP, CERM, 18pF, 50V, +/-5%, C0G/NP0, 0402"
C314 C316: "CAP, CERM, 15pF, 50V, +/-5%, C0G/NP0, 0402"
C317 C318: "CAP, CERM, 12pF, 50V, +/-5%, C0G/NP0, 0402"
C319: "CAP, CERM, 1000pF, 50V, +/-5%, C0G/NP0, 0402"
C601 C607 C805 C806 C807 C901: library part Cap, "Capacitor"
C602: library part "Cap Pol1", "Polarized Capacitor (Radial)"
C603 C604 C605 C606: "Capacitor"
C608 C609 C610 C611 C701 C702: library part CAP
C801 C802 C803 C804: library part CAP, "Capacitor"
D601: "Typical RED GaAs LED"
D701 D702: library part "Diode 1N4007", "1 Amp General Purpose Rectifier"
F601: library part "Fuse 1", "Fuse"
FB301: "0.25A Ferrite Bead, 1000 ohm @ 100MHz, SMD"
JP401: library part Jumper2-2, "Jumper2"
JP801: library part Jumper2-2
L101: library part L0402-15n, "Inductor, 320mA, ±5%"
L102: library part L0603-10μ, "Inductor, 80mA, ±10"
L103: library part L0402-3n3, "Inductor, 190mA, ±0.1nH"
L104: library part L0402-4n7, "Inductor, 160mA, ±0.1nH"
L105: library part L0402-10n, "Inductor, 100mA, ±2%"
L301: "Inductor, Multilayer, Air Core, 2.2nH, 0.3A, 0.12 ohm, SMD"
L302: "Inductor, Multilayer, Ferrite, 5.1nH, 0.3A, 0.2 ohm, SMD"
L303 L304: "Inductor, Multilayer, Ferrite, 2nH, 0.3A, 0.1 ohm, SMD"
LD1: "Avago, HSMF-A203 Bi-Color LED"
M201: "CC2530 SZ1 Module"
M401: "ESP-12 Wi-Fi Module by AI-Thinker"
P101 P201 P301 P401 P603 P701 P801 P901: "Synio Header-L, 12-Pin"
P102 P202 P302 P402 P802: "Synio Header-R, 12-Pin"
P602: "Header, 2-Pin, Dual row"
R1 R401 R402 R403 R602 R603 R604 R605 R701 R702 R703 R901 R902: library part Res2, "Resistor"
R303: "RES, 2.74k ohm, 1%, 0.063W, 0402"
R304: "RES, 56.2k ohm, 1%, 0.063W, 0402"
R601: library part Res, "Resistor"
R801 R802: library part res1, "Resistor"
S601 S801: library part SW-PB, "Switch"
T701: "Test Point"
U101: library part nRF51822-QFAA-XLR2.4, "Multi-protocol Bluetooth Low Energy and 2.4GHz proprietary system-on-chip"
U301: "2.4-GHz Bluetooth low energy and Proprietary System-on-Chip, RHA0040H"
U602: library part LDO-SOT23-5, "General LDO SOT23-5"
U701: "Real Time Clock/Calendar"
U901: library part At24CXX, "IIC EEPROM"
W701 W702 W703: "Jumper Wire"
X101: library part "XTAL_FC-135 32.768k", "EPSON TOYOCOM - FC-135 32.768KHZ ±20PPM,9.0PF - CRYSTAL, SM, WATCH"
X102: library part NX2520SA-16MHZ-STD-CSW-5, "XTAL SMD 2520, 16MHz, 8pF, ±15ppm"
X301: "CRYSTAL, 32.768KHZ, 9PF, SMD"
X302: "Crystal, 32MHz, 10pF, SMD"
X701: library part MC306
X801 Y601: library part XTAL, "Crystal Oscillator"

## Via types
v1: diameter 22, hole 10, Top Layer to Bottom Layer, tented both sides, 125 vias
v2: diameter 32, hole 14, Top Layer to Bottom Layer, 96 vias
v3: diameter 24, hole 12, Top Layer to Bottom Layer, tented both sides, 33 vias
v4: diameter 25, hole 12, Top Layer to Bottom Layer, 19 vias
v5: diameter 25.98, hole 12.99, Top Layer to Bottom Layer, 16 vias
v6: diameter 25, hole 12, Top Layer to Bottom Layer, tented both sides, 13 vias
v7: diameter 50, hole 28, Top Layer to Bottom Layer, 8 vias
v8: diameter 30, hole 15, Top Layer to Bottom Layer, 2 vias

## Nets (pads, with @x,y where several pads share a name; then routed paths per layer and width w, separated by ;. In a path a pad name is that pad's centre, name@x,y a point inside that pad or via, vN(x,y) a via of type N, cw(c..) or ccw(c..) an arc to the next point about the centre after c; other vN are vias at no path point)
1-AVDD: C106.1 C108.2 L101.2 SB103.2 U101.35 U101.36 | length 808.7
  Top Layer w8: U101.35@674.49,3107.28 685,3107.28
  Top Layer w12: 685,3107.28 685,3080 690,3075 750.32,3075 C106.1@760.32,3085 ; L101.2@685,3553.7 709.72,3553.7 C108.2@753.43,3510 750,3506.57 SB103.2@750,3447.6 v3@847.4,3447.6
  Bottom Layer w12: v3(720,3075) 720,3145 874,3299 874,3416 855,3435 v3(855,3445)
1-SWCLK: P103.4 U101.24 | length 1004.8
  Top Layer w8: v3(330,3115) 380,3115 404.76,3139.76 U101.24@484.53,3139.76
  Bottom Layer w8: v3(330,3115) 330,3625 365,3660 490,3660 P103.4@600,3770
1-SWDIO/NRST: P103.3 P103.5 U101.23 | length 1249.7
  Top Layer w8: v3(290,3135) 300,3135 320.51,3155.51 U101.23@484.53,3155.51
  Bottom Layer w8: v3(290,3135) 290,3660 325,3695 430,3695 500,3765 P103.5@500,3770 500,3800 525,3825 645,3825 P103.3@700,3770
1-VDD: C109.1 C115.1 P103.1 SB103.1 U101.1 U101.12 | length 1079.9
  Top Layer w8: U101.1@690.24,3345.47 697.38,3352.62 ; C109.1@741.04,3352.62 C109.1@753.43,3365 C109.1@753.43,3380
  Top Layer w15: 697.38,3352.62 C109.1@741.04,3352.62
  Top Layer w18: 454.68,3392.82 C115.1@454.68,3350 459.68,3345 510,3345 ; SB103.1@750,3410 750,3383.43 C109.1@753.43,3380 ; 763.9,3410 v3(820,3410)
  Top Layer w25: v3(450,3415) 454.68,3410.31 454.68,3392.82
  Bottom Layer w25: v3(450,3415) 475,3440 820,3440 ; v3(820,3410) 820,3440 ; P103.1@900,3770 900,3735 810,3645 810,3450 820,3440
  other v3: 465,3440
3-AIN0: P302.11 U301.19 | length 837.6
  Top Layer w8: U301.19@3385.16,3152.27 3537.27,3152.27 3580,3195 3630,3195 3650,3215 3650,3460 3750,3560 3750,3645 3775,3670 P302.11@3815,3670
3-AIN1: P302.10 U301.18 | length 748.7
  Top Layer w8: U301.18@3385.16,3132.58 3547.58,3132.58 3590,3175 3635,3175 3670,3210 3670,3445 3795,3570 P302.10@3815,3570
3-AIN2/RX1: P302.9 U301.17 | length 673.8
  Top Layer w8: U301.17@3385.1,3112.9 3562.9,3112.9 3605,3155 3640,3155 3690,3205 3690,3420 3740,3470 P302.9@3785,3470
3-AIN3/TX1: P302.8 U301.16 | length 625.4
  Top Layer w8: U301.16@3386.21,3093.21 3573.21,3093.21 3605,3125 3640,3125 3710,3195 3710,3335 3745,3370 P302.8@3815,3370
3-AIN4/CT1: P302.7 U301.15 | length 548
  Top Layer w8: U301.15@3385.47,3073.53 3583.53,3073.53 3613.7,3103.7 3657,3103.7 3728.3,3175 3728.3,3238.3 3760,3270 P302.7@3815,3270
3-AIN5/RT1: P302.6 U301.14 | length 511
  Top Layer w8: U301.14@3385.16,3053.84 3693.84,3053.84 3728.84,3053.84 3750,3075 3750,3110 3750,3140 3780,3170 P302.6@3810,3170
3-AIN6: P302.5 U301.13 | length 444.7
  Top Layer w8: U301.13@3385.16,3034.16 3759.16,3034.16 3795,3070 P302.5@3815,3070
3-AIN7: P302.4 U301.12 | length 448.3
  Top Layer w8: U301.12@3385.16,3014.47 3630.53,3014.47 3675,2970 P302.4@3815,2970
3-CS: P301.3 U301.7 | length 713.2
  Top Layer w8: P301.3@2715,2870 2745,2840 2945,2840 2975,2810 3207,2810 3300.32,2903.32 U301.7@3300.32,2967.68
3-DC: P303.4 U301.34 | length 809
  Top Layer w8: v8(2935,3075) 2960,3075 2997.9,3112.9 U301.34@3157.9,3112.9
  Bottom Layer w8: v8(2935,3075) 2936,3074 2936,2869 3065,2740 3160,2740 3200,2700 P303.4@3200,2670
3-DD: P303.3 U301.35 | length 788.5
  Top Layer w8: v8@3000,3060 3033.21,3093.21 U301.35@3156.81,3093.21
  Bottom Layer w8: v8(3000,3070) 3000,2860 3080,2780 3240,2780 3300,2720 P303.3@3300,2670
3-GPIO0: P301.10 U301.36 | length 878.5
  Top Layer w8: P301.10@2715,3570 2820,3465 2820,3165 2865,3120 2865,3080 2910,3035 3015,3035 3053.53,3073.53 U301.36@3156.81,3073.53
3-GPIO1: P301.11 SB302.1 | length 540.2
  Top Layer w7: P301.11@2715,3670 2760,3670 2805,3625 2805,3585 2845,3545 SB302.1@2845,3210
3-GPIO2: P301.12 SB301.1 | length 576.2
  Top Layer w7: P301.12@2715,3770 2720,3770 2825,3665 2825,3600 2875,3550 2875,3389.01 2920,3344.01 2965.99,3344.01 2971.62,3338.38 2971.62,3337.07 SB301.1@2976.62,3332.07
3-MI: P301.4 U301.6 | length 717.8
  Top Layer w8: P301.4@2715,2970 2740,2970 2775,2935 2775,2905 2820,2860 2950,2860 2970,2840 3197,2840 3280,2923 U301.6@3280,2970
3-MO: P301.5 U301.5 | length 685.7
  Top Layer w8: P301.5@2715,3070 2889,2896 2983.7,2896 3011.19,2868.5 3185.5,2868.5 3260.95,2943.95 U301.5@3260.95,2968.95
3-NRST: P303.5 R303.1 | length 939.2
  Top Layer w8: P303.5@3100,2670 3167.5,2737.5 3222.5,2737.5 3260,2775 v1(3530,2775) ; R303.1@3505,3185 3520,3185 v1(3535,3200) v1@3535,3202.38
  Bottom Layer w8: v1(3530,2775) 3535,2780 v1(3535,3200)
3-SCL: P301.7 U301.2 | length 775.5
  Top Layer w8: P301.7@2715,3270 2755,3230 2755,3149.8 2805,3099.8 2805,3025.3 2905.3,2925 2995,2925 3020,2900 3160,2900 3202.09,2942.09 U301.2@3202.09,2969.19
3-SDA: P301.6 U301.3 | length 726.6
  Top Layer w8: P301.6@2715,3170 2715,3150 2770,3095 2770,3038.2 2898.2,2910 2989.5,2910 3014.5,2885 3175,2885 3221.77,2931.77 U301.3@3221.77,2969.19
3-SS: P301.2 U301.8 | length 737.8
  Top Layer w8: P301.2@2715,2770 2720,2775 3212,2775 3320,2883 U301.8@3320,2969
3-T0: P302.3 U301.11 | length 480.9
  Top Layer w8: U301.11@3385.79,2994.79 3565.21,2994.79 3640,2920 3765,2920 P302.3@3815,2870
3-T1: P302.2 U301.9 | length 615.7
  Top Layer w8: U301.9@3339.88,2969.19 3339.88,2870.12 3380,2830 3450,2830 3470,2810 3775,2810 P302.2@3815,2770
3-T2/TX0: P301.8 U301.38 | length 715.7
  Top Layer w8: P301.8@2715,3370 2775,3310 2775,3160 2827.5,3107.5 2827.5,3072.5 2900,3000 3040,3000 3074,3034 U301.38@3155,3034
3-T3/RX0: P301.9 U301.37 | length 795.6
  Top Layer w8: P301.9@2715,3470 2715,3450 2795,3370 2795,3165 2845,3115 2845,3080 2905,3020 3030,3020 3063.84,3053.84 U301.37@3157.84,3053.84
3-VDD: FB301.2 P303.1 | length 223.6
  Top Layer w20: v4(3480,2850) FB301.2@3480,2885.31
  Bottom Layer w20: v4(3480,2850) 3480,2690 P303.1@3500,2670
ANT: C111.1 C112.1 L103.2 | length 865.3
  Top Layer w50: 210,2743 771.01,2743 820,2791.99 820,3027
ANT1: L104.1 L105.2 U101.31 | length 98.1
  Top Layer w8: L105.2@598.7,3005 598.7,3037.4 L104.1@601.3,3040 ; 600,3050 600,3060 611.5,3071.5 U101.31@611.5,3107.28
ANT2: C107.1 L104.2 U101.32 | length 113.6
  Top Layer w8: U101.32@627.24,3107.28 627.24,3072.76 638.7,3061.3 L104.2@638.7,3040
  Top Layer w20: L104.2@638.7,3040 C107.1@680.32,3040
D3V3: C602.1 C603.2 C604.2 C607.2 C610.2 C611.2 C804.1 C805.1 C806.1 C807.1 C901.1 D601.1 D701.1 M201.3 M201.4 M401.8 P203.1 P403.1 P601.1 P702.1 P803.1 P902.1 R1.2 R401.2 R402.1 R602.1 R603.1 R604.1 R702.2 R703.2 R801.1 R802.2 R901.2 R902.2 SB901.2 SB902.2 SB903.2 U601.13 U601.20 U602.5 U801.5 U801.16 U901.8 | length 12671.6
  Top Layer w10: v2@270,1960 v2(275,1960) SB903.2@412,1960 ; v2(275,2155) 389,2155 SB901.2@402,2142 ; v2@277,2052 SB902.2@402,2052 ; C807.1@405,595 405,590 444,551 575,551 587.8,563.8 U801.5@587.8,603.27 ; C804.1@587.8,300 U801.16@587.8,386.73 ; U601.20@3518.78,690 U601.20@3518.94,690.16 3570,690.16 3579.84,690.16 3590,680 C603.2@3610,680 ; C603.2@3615,675 C603.2@3610,680 ; C603.2@3615,685 C603.2@3610,680 ; C602.1@3631.02,511.02 C602.1@3632.5,512.5
  Top Layer w12: U601.13@3518.94,511.02 3611.02,511.02 C602.1@3630,530
  Top Layer w15: R602.1@2940,1050 2970,1050 2980,1060 2980,1225 2985,1230 D601.1@3015,1230 3055,1230 3065,1220 3065,1110 3165,1010 3165,830 v7@3220,775
  Top Layer w20: v2(275,2155) 320,2200 320,2205 810,2205 885.83,2129.17 U901.8@885.83,2100 1020,2100 1055,2065 1055,1820 1005,1770 ; C804.1@595,300 v2@621.75,300 ; R901.2@850,1790 R902.2@925,1790 985,1790 1005,1770 ; P902.1@900,1370 945,1415 945,1710 1005,1770 ; v7(3495,750) 3500,755 3615,755 ; C603.2@3615,685 3615,755 ; C602.1@3630,515 3632.5,512.5 C604.2@3632.5,470 ; C602.1@3630,530 3630,540 3745,655 ; C610.2@3646.69,860 3646.69,886.69 3665,905 R604.1@3665,930 C611.2@3730,930 3730,955 3745,970 U602.5@3745,998.7 ; C610.2@3650,860 3650,791.69 3686.69,755 3615,755
  Top Layer w25: R802.2@630,1185 v2(695,1185) ; R801.1@790,590 820,590 840,570 840,425 ; C806.1@795,410 825,410 840,425 ; v2@865,945 v2(870,940) 895,915 895,690 985,600 985,410 940,365 900,365 ; P803.1@900,70 900,365 ; R401.2@1520,2075 1520,2110 ; R1.2@1520,2140 1520,2110 ; M201.4@1556.23,3276.3 1620,3276.3 1670,3326.3 ; M201.3@1556.23,3326.3 1670,3326.3 ; v7(1851.3,2815) 2080,2815 2200,2695 P203.1@2200,2670 ; v7(1851.3,3326.3) 1670,3326.3 ; R402.1@2370,1940 2390,1940 2440,1890 2440,1550 2260,1370 P403.1@2200,1370 2110,1460 1720,1460 1644.76,1535.24 M401.8@1644.76,1623.82 1556.18,1623.82 1495,1685 1495,1900 1475,1920 1475,2095 1490,2110 1520,2110 ; R703.2@2860,1555 R702.2@2910,1555 D701.1@3055,1555 3055,1540 3040,1525 3085,1480 3430,1480 3472.5,1437.5 3472.5,1397.5 P702.1@3500,1370 ; P601.1@3500,70 3535,70 3640,175 C607.2@3640,220 3640,295 R603.1@3645,300 3645,345 3665,365 3715,365 3785,435 3785,615 3745,655 3745,740 3730,755 3686.69,755 ; 840,425 900,365
  Bottom Layer w10: v2(275,1960) v2(275,2045) v2(275,2155)
  Bottom Layer w15: v7(3220,785) 3470,785 3505,750 v7(3495,750)
  Bottom Layer w20: v2(410,590) 420,590 460,550 460,380 543.25,296.75 v2(621.75,296.75) v2(901.75,296.75) v2@910,305
  Bottom Layer w25: v2(695,1185) 720,1210 780,1210 870,1120 v2(870,940) ; v7(1851.3,2815) v7(1851.3,3326.3)
D5V: C608.2 C609.2 F601.1 U602.1 U602.3 | length 578.8
  Top Layer w18: F601.1@3520,1140 3520,1220 3555,1255 3685,1255 C609.2@3676.69,1246.69
  Top Layer w23: C608.2@3670.2,1183.5 U602.3@3670.2,1105 3670.2,1069.8 3685,1055 3740,1055 3745,1060 U602.1@3745,1105
  Top Layer w25: C608.2@3670.2,1183.5 C608.2@3676.69,1190 C609.2@3676.69,1246.69
DEC1: C105.1 U101.39 | length 56.2
  Top Layer w8: U101.39@722.72,3171.26 766.57,3171.26 C105.1@775.32,3180
DEC2: C113.1 U101.29 | length 101.2
  Top Layer w8: C113.1@519.68,3040 535,3040 580,3085 U101.29@580,3107.28